# EAGLE board aqm_brd (EAGLE 9.6.2)
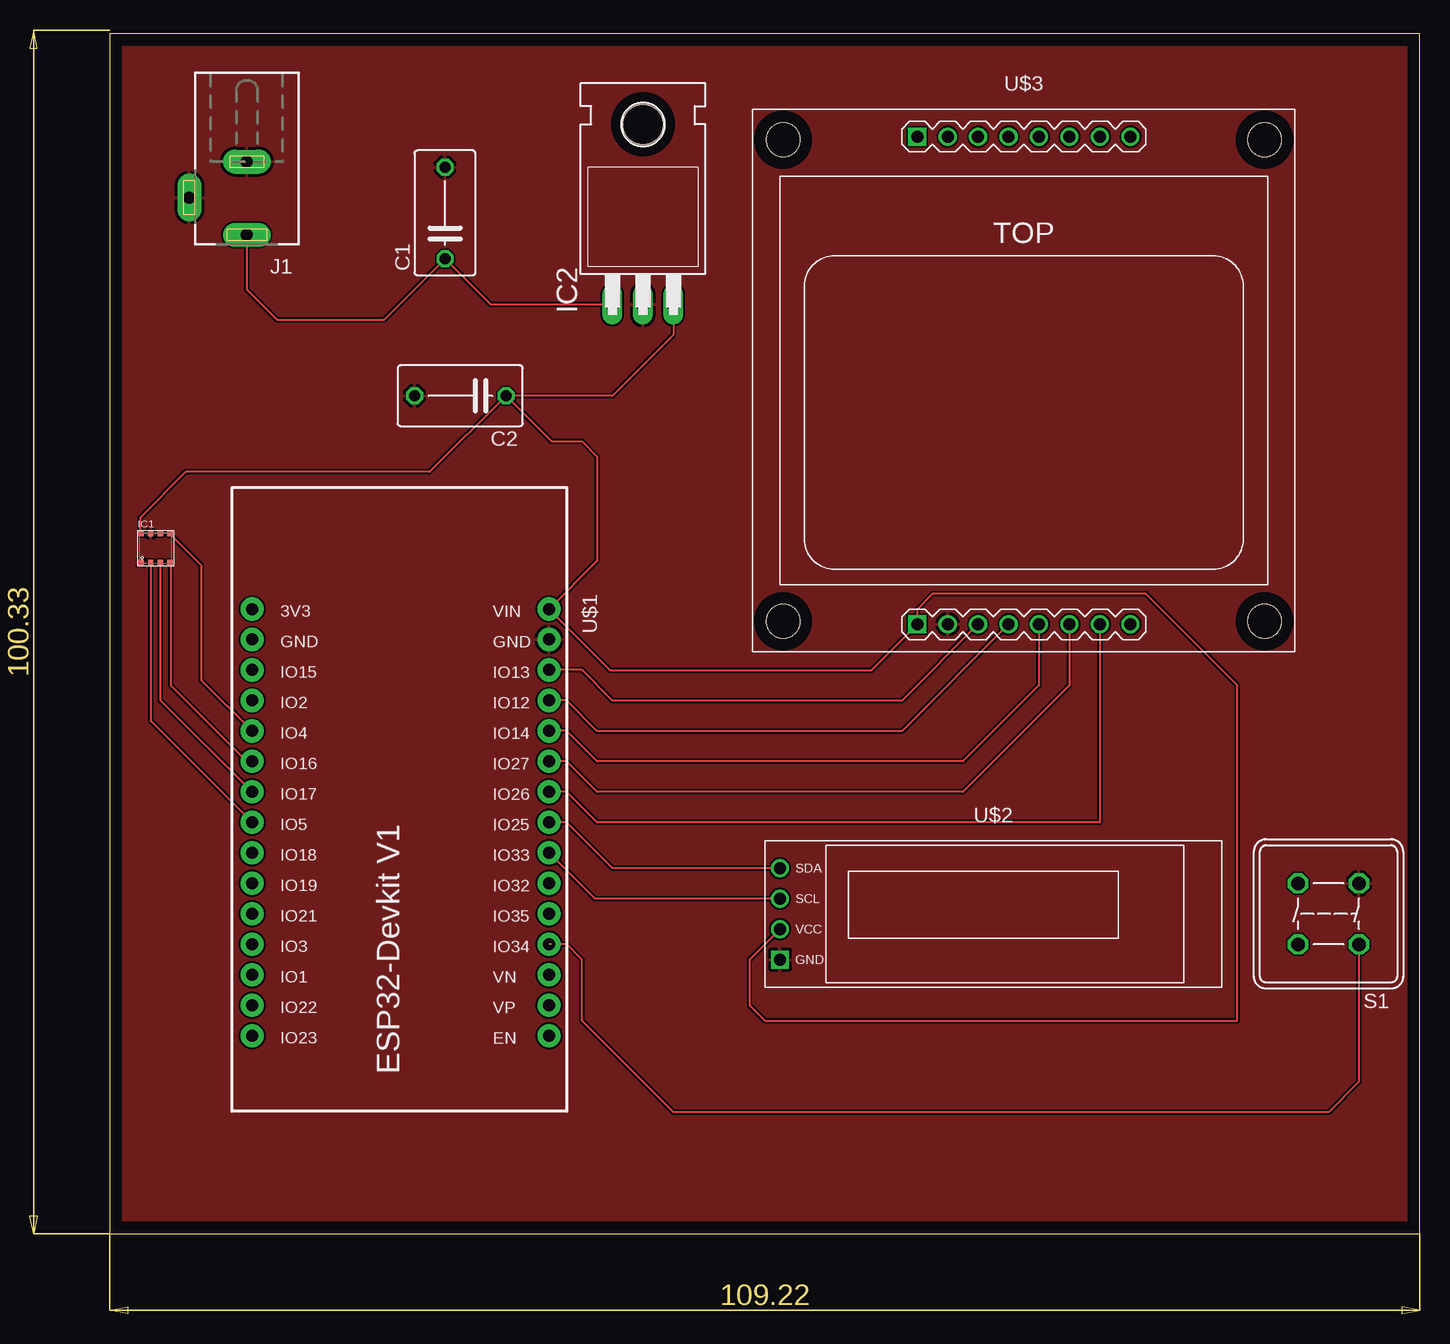
[diagram p0: board, top side]

Size 109.2 x 100 mm. Coordinates in mm from the lower left corner, seen from the top.
Outline: 0,0 109.2,0 109.2,100 0,100 0,0
Copper layers (1*16): Top 0.035mm / dielectric 1.5mm / Bottom 0.035mm
Design rules "default": minimum track width 6mil, minimum drill 0.35mm, track to track 6mil, track to pad 6mil, pad to pad 6mil, via to via 6mil, smd to smd 6mil, copper to edge 40mil, drill to drill 6mil, minimum pad ring 10mil, minimum via ring 8mil, stop-mask expansion 4mil, vias tented up to drill 0mil, thermal gap 10mil

## Footprints (pad centres in the part's own frame; a part is rotated, then mirrored left to right if it is on the bottom)
C075-052X106 = drill 0.914 octagon: 1 -3.81,0; 2 3.81,0
BME680 = smd 0.45 x 0.45: 1 -1.2,-1.2; 2 -0.4,-1.2; 3 0.4,-1.2; 4 1.2,-1.2; 5 1.2,1.2; 6 0.4,1.2; 7 -0.4,1.2; 8 -1.2,1.2
TO220H = drill 1.118 long: 1 -2.54,-10.16; 2 0,-10.16; 3 2.54,-10.16 | hole 3.302: 0,4.826
DCJ0202 = drill 1 pad 2 long: 1 0,3.1; 2 4.8,0; 3 0,-3
DTE6K = drill 1.118 octagon: 1 -2.54,2.54; 2 2.54,2.54; 3 2.54,-2.54; 4 -2.54,-2.54
ESP32-DEVKITV1 = drill 1 pad 1.93: 1 -22.87,-13.54; 2 -20.33,-13.54; 3 -17.79,-13.54; 4 -15.25,-13.54; 5 -12.71,-13.54; 6 -10.17,-13.54; 7 -7.63,-13.54; 8 -5.09,-13.54; 9 -2.55,-13.54; 10 -0.01,-13.54; 11 2.53,-13.54; 12 5.07,-13.54; 13 7.61,-13.54; 14 10.15,-13.54; 15 12.69,-13.54; 16 12.69,11.23; 17 10.15,11.23; 18 7.61,11.23; 19 5.07,11.23; 20 2.53,11.23; 21 -0.01,11.23; 22 -2.55,11.23; 23 -5.09,11.23; 24 -7.63,11.23; 25 -10.17,11.23; 26 -12.71,11.23; 27 -15.25,11.23; 28 -17.79,11.23; 29 -20.33,11.23; 30 -22.87,11.23
DISPLAY-OLED-128X32 = drill 1 square: 1 -17.78,-3.81 | drill 1: 2 -17.78,-1.27; 3 -17.78,1.27; 4 -17.78,3.81
DISPLAY-NOKIA-3310 = drill 1 square: J1.1 -8.89,-20.32; J2.1 -8.89,20.32 | drill 1: J1.2 -6.35,-20.32; J1.3 -3.81,-20.32; J1.4 -1.27,-20.32; J1.5 1.27,-20.32; J1.6 3.81,-20.32; J1.7 6.35,-20.32; J1.8 8.89,-20.32; J2.2 -6.35,20.32; J2.3 -3.81,20.32; J2.4 -1.27,20.32; J2.5 1.27,20.32; J2.6 3.81,20.32; J2.7 6.35,20.32; J2.8 8.89,20.32 | hole 2.8: -20.066,-20.066; 20.066,-20.066; 20.066,20.066; -20.066,20.066

## Placement (x,y rotation side)
C1  470uF  [C075-052X106]  27.94,85.09 90 top
C2  470uF  [C075-052X106]  29.21,69.85 180 top
IC1  BME680  [BME680]  3.81,57.15 0 top
IC2  7805T  [TO220H]  44.45,87.63 0 top
J1  DCJ0202  [DCJ0202]  11.43,86.36 180 top
S1  DTE6K  [DTE6K]  101.6,26.67 180 top
U$1  [ESP32-DEVKITV1]  25.4,29.21 270 top
U$2  DISPLAY-OLED-128X32  [DISPLAY-OLED-128X32]  73.66,26.67 0 top
U$3  DISPLAY-NOKIA-3310  [DISPLAY-NOKIA-3310]  76.2,71.12 0 top

## Library data of the parts
C1 C2 = rcl; SPICEPREFIX: C
IC1 = bosch-bme680
IC2 = linear
J1 = con-jack; OC_FARNELL: unknown; OC_NEWARK: unknown
S1 = switch-misc
U$1 = ESP32-DEVKITV1
U$2 U$3 = diy-modules

## Nets
3V3: C2.1 IC1.8 IC2.3 U$1.30 U$2.2 U$3.J1.1
GND: C1.2 C2.2 IC1.1 IC1.7 IC2.2 J1.2 J1.3 S1.4 U$1.29 U$2.1 U$3.J1.2
GND.2: U$3.J2.2
N$1: U$1.26 U$3.J1.5
N$2: U$1.28 U$3.J1.3
N$3: U$1.24 U$3.J1.7
N$4: U$1.25 U$3.J1.6
N$5: C1.1 IC2.1 J1.1
N$6: U$1.23 U$2.4
N$7: IC1.2 U$1.8
N$9: U$1.22 U$2.3
N$10: IC1.4 U$1.6
N$11: IC1.5 U$1.5
N$12: U$1.27 U$3.J1.4
N$13: IC1.3 U$1.7
N$16: S1.1 U$1.19
VCC.2: U$3.J2.1
VDDIO: IC1.6

## Tracks (layer width: path | path; a pad name or v marks a point on that pad's centre or on a via)
3V3
  Top 0.152: IC2.3 46.99,74.93 41.91,69.85 C2.1 | C2.1 36.83,66.04 39.37,66.04 40.64,64.77 40.64,56.09 U$1.30 41.72,46.99 63.5,46.99 U$3.J1.1 67.31,52.07 68.58,53.34 86.36,53.34 93.98,45.72 93.98,17.78 54.61,17.78 53.34,19.05 53.34,22.86 U$2.2 | C2.1 26.67,63.5 6.35,63.5 2.54,59.69 2.54,58.42 IC1.8
GND
  pour Top: 0,100.33 0,1.27 0,0 109.22,0 109.22,100.33
N$1
  Top 0.152: U$3.J1.5 77.47,45.72 71.13,39.38 40.63,39.38 38.09,41.92 U$1.26
N$2
  Top 0.152: U$3.J1.3 66.04,44.45 41.91,44.45 39.36,47 U$1.28
N$3
  Top 0.152: U$3.J1.7 82.55,34.29 40.64,34.29 38.09,36.84 U$1.24
N$4
  Top 0.152: U$3.J1.6 80.01,45.72 71.13,36.84 40.63,36.84 38.09,39.38 U$1.25
N$5
  Top 0.152: J1.1 11.43,78.74 13.97,76.2 22.86,76.2 C1.1 31.75,77.47 IC2.1
N$6
  Top 0.152: U$2.4 41.91,30.48 38.09,34.3 U$1.23
N$7
  Top 0.152: IC1.2 3.41,42.75 U$1.8
N$9
  Top 0.152: U$1.22 40.45,27.94 U$2.3
N$10
  Top 0.152: IC1.4 5.08,55.88 5.08,45.72 11.42,39.38 U$1.6
N$11
  Top 0.152: IC1.5 7.62,55.74 7.62,46.16 U$1.5
N$12
  Top 0.152: U$3.J1.4 66.04,41.91 40.64,41.91 38.09,44.46 U$1.27
N$13
  Top 0.152: IC1.3 4.21,44.49 U$1.7
N$16  (1 unrouted)
  Top 0.152: S1.1 104.14,12.7 101.6,10.16 46.99,10.16 39.37,17.78 39.37,22.86 38.1,24.13 36.83,24.13